# Altium PCB Mosfet_Holes.PcbDoc
Units mil, origin at the board's own origin, x right, y up, seen from the top; angles counter-clockwise.
Board outline 6000 x 4000 mil, 2 copper layers (Top Layer, Bottom Layer); 2 components, 0 nets, 12 pads, 0 vias.
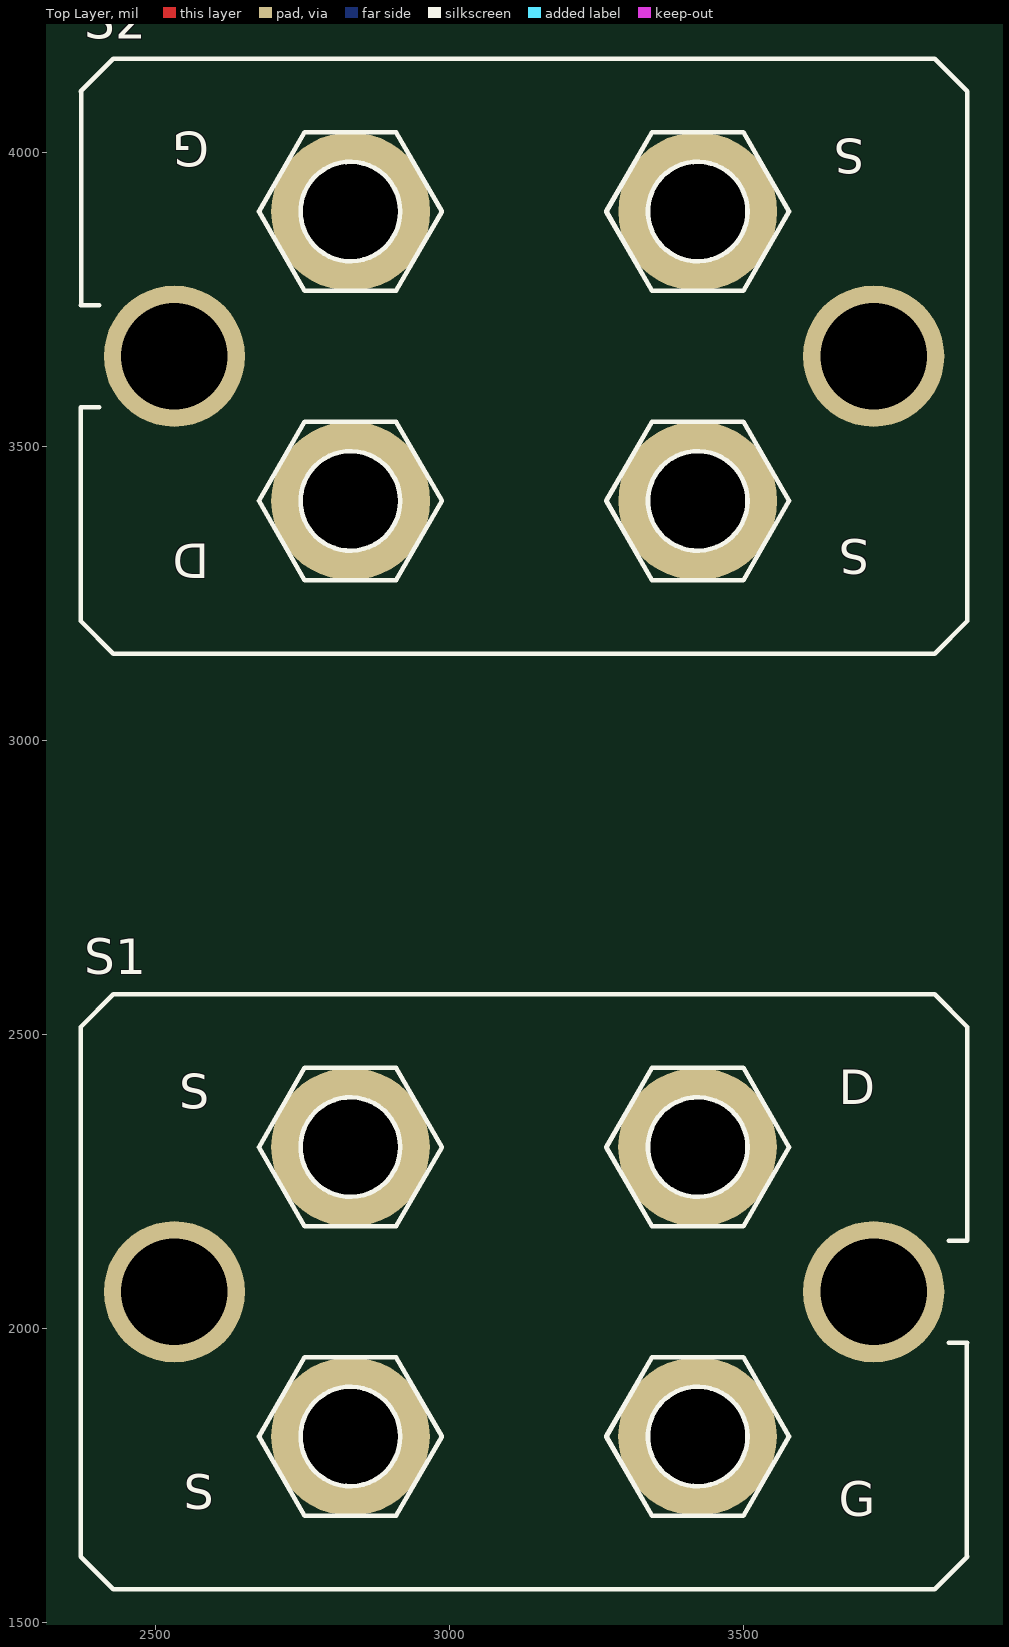
[diagram p0: Top Layer view]
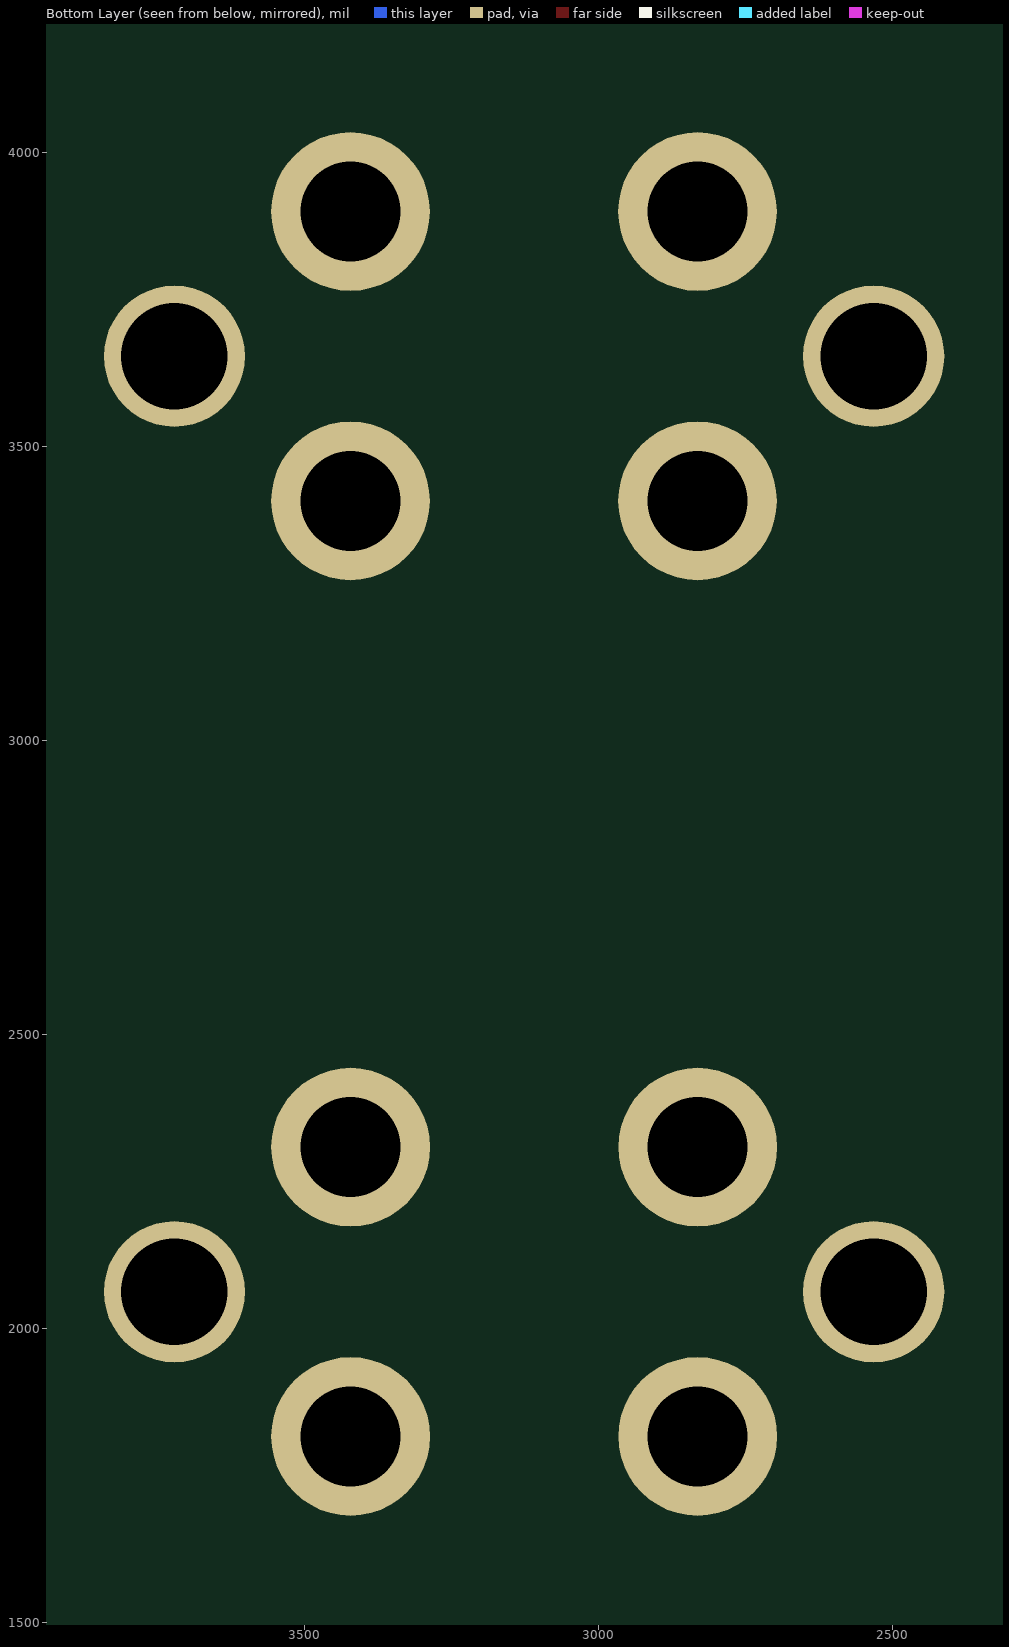
[diagram p1: Bottom Layer view, seen from below]

## Layer stack, top to bottom
Top Solder: solder mask 0.4, Solder Resist, Dk 3.5
Top Layer: signal copper 1.4
Dielectric 1: dielectric 12.6, FR-4, Dk 4.8
Bottom Layer: signal copper 1.4
Bottom Solder: solder mask 0.4, Solder Resist, Dk 3.5

## Board outline
1000,1000 7000,1000 7000,5000 1000,5000

## Design rules (kind name [scope] priority, off if disabled: settings)
Clearance [All] p1: gap=10
PolygonConnect [All] p1: connectstyle=Relief reliefconductorwidth=10 reliefentries=4 polygonreliefangle="90 Angle" airgapwidth=10
RoutingVias [All] p1: holewidth=28 width=50 viastyle="Through Hole" minholewidth=28 minwidth=50 maxholewidth=28 maxwidth=50
SolderMaskExpansion [All] p1: expansion=4
Width [All] p1: maxlimit=10 minlimit=10 preferedwidth=10
30 further rules are at their usual default settings.

## Components (designator, comment, footprint, x,y, rotation, side; value= is the part's Value field where it differs from the comment)
S1 "IXFN420N10T" SOT-227B 3126.51,2062 r0 top
S2 "IXFN420N10T" SOT-227B 3126.51,3653 r180 top

## Footprints (in the part's own frame and the unit in brackets; to place one, negate y for a bottom-side part, rotate by r counter-clockwise, add the part's x,y. Pads: shape width x height; smd on the part's side, far side on the other; paste and mask are expansions set on the pad)
SOT-227B [mil] "SOT-227; 4 Screw Terminals, 2 Mounting Holes"
  round 270 hole 170 unplated: 1(-295.21,-246) 1(-295.21,246) 2(295,-246) 3(295,246)
  round 240.16 hole 181.1: MH1(-594.49,0) MH2(594.49,0)
  silkscreen extent -754,-506 754,506

## Part data
S1 S2: library part MOSFET-N, "N-Channel MOSFET"

## Nets (pads, with @x,y where several pads share a name; then routed paths per layer and width w, separated by ;. In a path a pad name is that pad's centre, name@x,y a point inside that pad or via, vN(x,y) a via of type N, cw(c..) or ccw(c..) an arc to the next point about the centre after c; other vN are vias at no path point)
pads on no net: S1.1 S1.2 S1.3 S1.MH1 S1.MH2 S2.1 S2.2 S2.3 S2.MH1 S2.MH2
copper on no net: | length 5.7
  Top Layer w60: 3421.73,3899 3425.73,3903

## Silkscreen, mask and mechanical layers (free items; w line width, h text height)
Mechanical 1:
  lines w10: 2284,1253 4970,1253 ; 2284,1255 2284,4648 ; 2285,4652 4971,4652 ; 4971,1257 4971,4650

## Dimensions
2284,4648 to 4950,4710 on Top Overlay
4971,4650 to 4970,1253 on Top Overlay
2532.02,3653 to 2373.65,3739.61 on Top Overlay
2532.02,3653 to 3721,3653 on Top Overlay
3721,3653 to 3721,2062 on Top Overlay

## Text inside footprints (layer, text, board x,y; h text height)
S1: Top Overlay "S" at 2539.9,2373.02 h59.05; Top Overlay "D" at 3661.95,2380.9 h59.05; Top Overlay "G" at 3661.95,1680.11 h59.05; Top Overlay "S" at 2547.77,1691.92 h59.05
S2: Top Overlay "S" at 3713.13,3341.97 h59.05 r180; Top Overlay "D" at 2591.08,3334.1 h59.05 r180; Top Overlay "G" at 2591.08,4034.89 h59.05 r180; Top Overlay "S" at 3705.25,4023.08 h59.05 r180